# EAGLE board RJ-45 Dash Daughter Board (EAGLE 8.6.1)
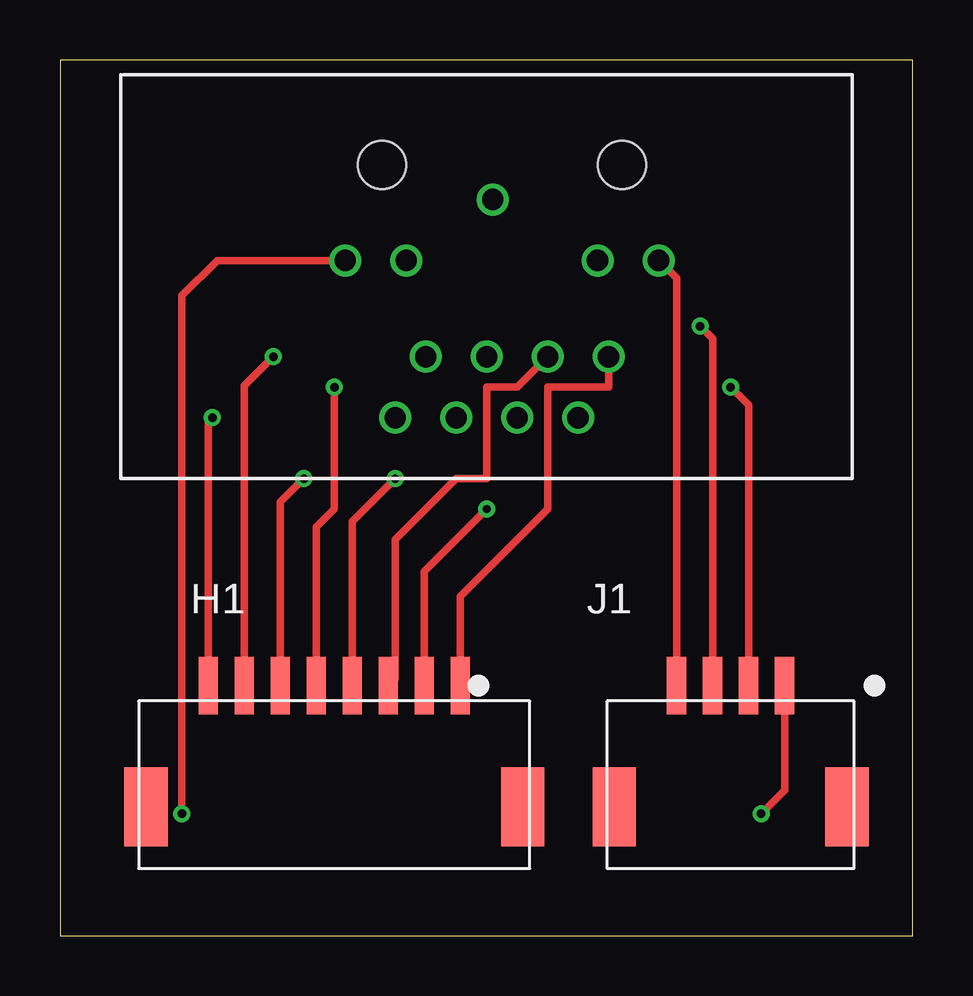
[diagram p0: board, top side]
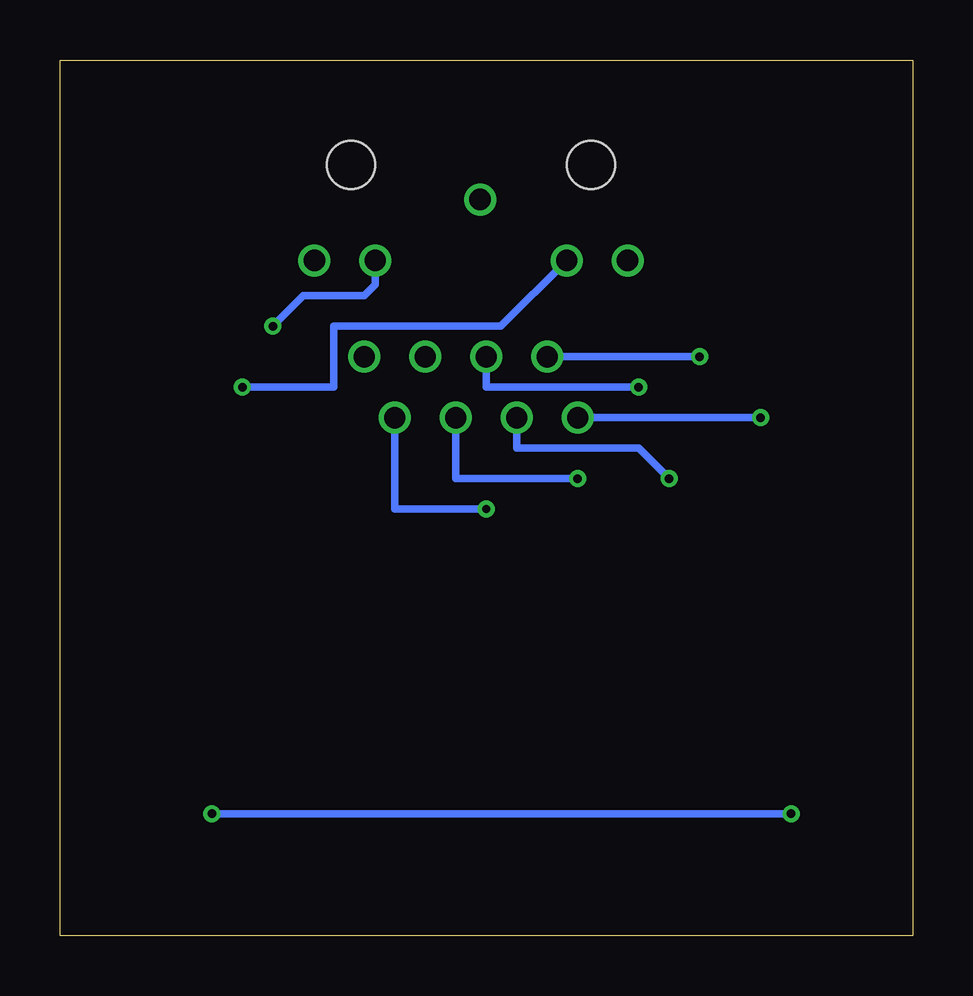
[diagram p1: board, bottom side, seen from below]

Size 35.54 x 36.5 mm. Coordinates in mm from the lower left corner, seen from the top.
Outline: 0,0 35.54,0 35.54,36.5 0,36.5 0,0
Copper layers (1*16): Top 0.0356mm / dielectric 1.5011mm / Bottom 0.0356mm
Design rules "OSH_PCB Rules": minimum track width 6mil, minimum drill 13mil, track to track 6mil, track to pad 6mil, pad to pad 6mil, via to via 6mil, smd to smd 6mil, copper to edge 15mil, drill to drill 6mil, minimum pad ring 7mil, minimum via ring 7mil, stop-mask expansion 3mil, vias tented up to drill 0mil, thermal gap 10mil

## Footprints (pad centres in the part's own frame; a part is rotated, then mirrored left to right if it is on the bottom)
MOLEX-CLIKMATE-8-VERTICAL-HEADER = smd 0.8 x 2.4: 1 5.25,4.064; 2 3.75,4.064; 3 2.25,4.064; 4 0.75,4.064; 5 -0.75,4.064; 6 -2.25,4.064; 7 -3.75,4.064; 8 -5.25,4.064 | smd 1.8 x 3.3: M1 7.85,-0.986; M2 -7.85,-0.986
MOLEX-CLIKMATE-4-VERTICAL-HEADER = smd 0.8 x 2.4: 1 2.25,4.064; 2 0.75,4.064; 3 -0.75,4.064; 4 -2.25,4.064 | smd 1.8 x 3.3: M1 4.85,-0.986; M2 -4.85,-0.986
RJ-45 = drill 0.889: P$1 0,0; P$2 1.27,2.54; P$3 2.54,0; P$4 3.81,2.54; P$5 5.08,0; P$6 6.35,2.54; P$7 7.62,0; P$8 8.89,2.54; P$9 10.973,-4.013; P$10 8.433,-4.013; P$11 0.457,-4.013; P$12 -2.083,-4.013; P$13 4.826,-6.553 | hole 2.007: -0.559,-8.001; 9.449,-8.001

## Placement (x,y rotation side)
H1  5025840870  [MOLEX-CLIKMATE-8-VERTICAL-HEADER]  11.43,6.35 0 top
J1  5025840470  [MOLEX-CLIKMATE-4-VERTICAL-HEADER]  27.94,6.35 0 top
U$1  RJ-45_12-PIN  [RJ-45]  22.86,24.13 180 top

## Library data of the parts
H1 J1 U$1 = FormE

## Nets
N$1: H1.1 U$1.P$1
N$2: H1.2 U$1.P$2
N$3: H1.3 U$1.P$3
N$4: H1.4 U$1.P$4
N$5: H1.5 U$1.P$5
N$6: H1.6 U$1.P$6
N$7: H1.7 U$1.P$7
N$8: H1.8 U$1.P$8
N$9: J1.1 U$1.P$9
N$10: J1.2 U$1.P$10
N$11: J1.3 U$1.P$11
N$12: J1.4 U$1.P$12

## Tracks (layer width: path | path; a pad name or v marks a point on that pad's centre or on a via)
N$1
  Top 0.305: H1.1 16.68,14.14 20.32,17.78 20.32,22.86 22.86,22.86 U$1.P$1
N$2  (via drill 0.35)
  Top 0.305: H1.2 15.18,15.18 v17.78,17.78
  Bottom 0.305: v17.78,17.78 21.59,17.78 U$1.P$2
N$3
  Top 0.305: H1.3 13.97,10.7 13.97,16.51 16.51,19.05 17.78,19.05 17.78,22.86 19.05,22.86 U$1.P$3
N$4  (via drill 0.35)
  Top 0.305: H1.4 12.18,17.26 v13.97,19.05
  Bottom 0.305: v13.97,19.05 19.05,19.05 U$1.P$4
N$5  (via drill 0.35)
  Top 0.305: H1.5 10.68,17.03 11.43,17.78 v11.43,22.86
  Bottom 0.305: v11.43,22.86 17.78,22.86 U$1.P$5
N$6  (via drill 0.35)
  Top 0.305: H1.6 9.18,18.07 v10.16,19.05
  Bottom 0.305: v10.16,19.05 11.43,20.32 16.51,20.32 U$1.P$6
N$7  (via drill 0.35)
  Top 0.305: H1.7 7.68,22.92 v8.89,24.13
  Bottom 0.305: v8.89,24.13 U$1.P$7
N$8  (via drill 0.35)
  Top 0.305: H1.8 6.18,21.42 v6.35,21.59
  Bottom 0.305: v6.35,21.59 U$1.P$8
N$9  (via drill 0.35)
  Top 0.305: J1.1 30.19,6.06 v29.21,5.08 | U$1.P$9 6.55,28.14 5.08,26.67 v5.08,5.08
  Bottom 0.305: v29.21,5.08 v5.08,5.08
N$10  (via drill 0.35)
  Top 0.305: J1.2 28.69,22.11 v27.94,22.86
  Bottom 0.305: v27.94,22.86 24.13,22.86 24.13,25.4 17.17,25.4 U$1.P$10
N$11  (via drill 0.35)
  Top 0.305: J1.3 27.19,24.88 v26.67,25.4
  Bottom 0.305: v26.67,25.4 25.4,26.67 22.86,26.67 22.4,27.13 U$1.P$11
N$12
  Top 0.305: J1.4 25.69,27.4 U$1.P$12